# EAGLE board RF12 board (EAGLE 6.2)
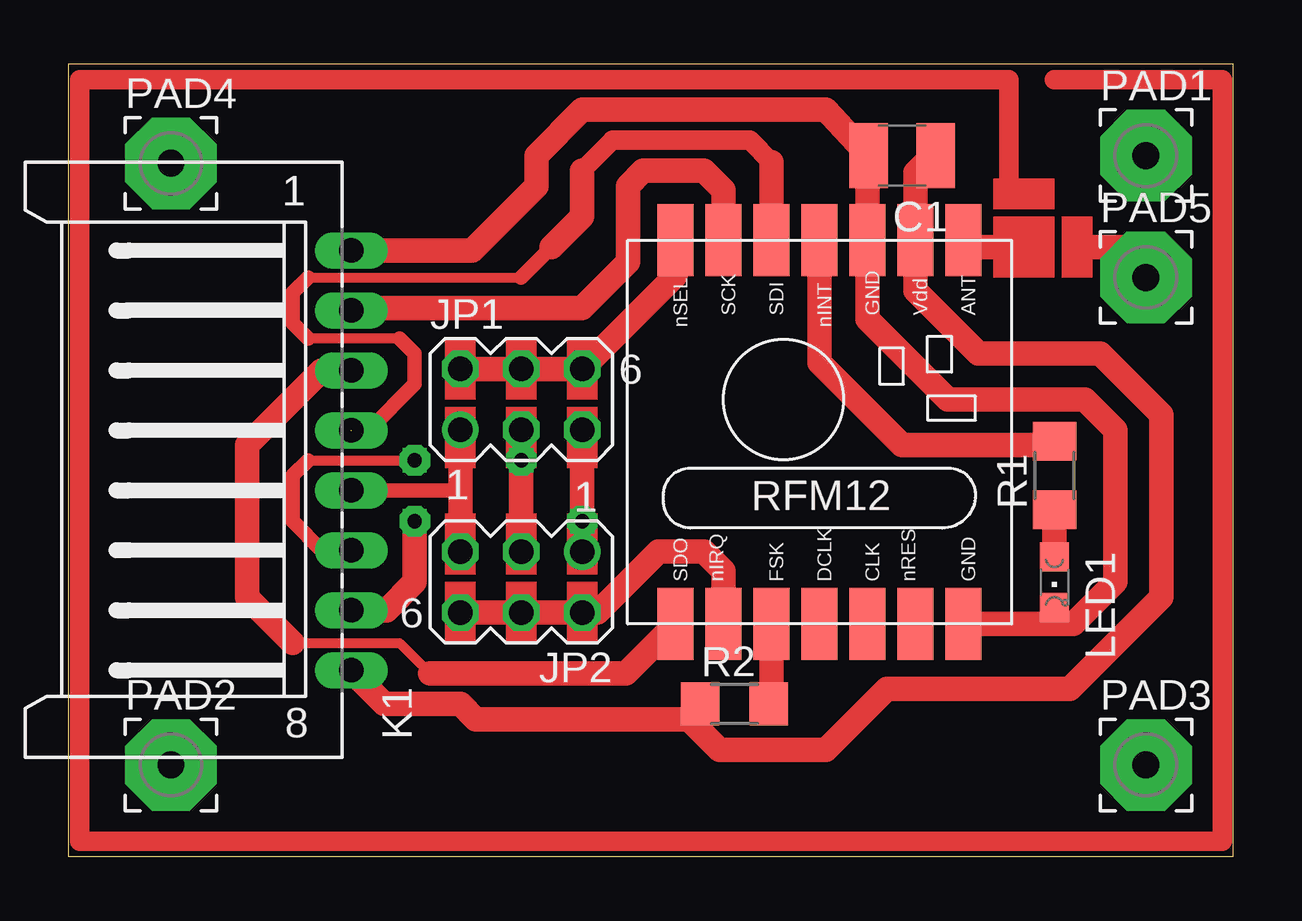
[diagram p0: board, top side]
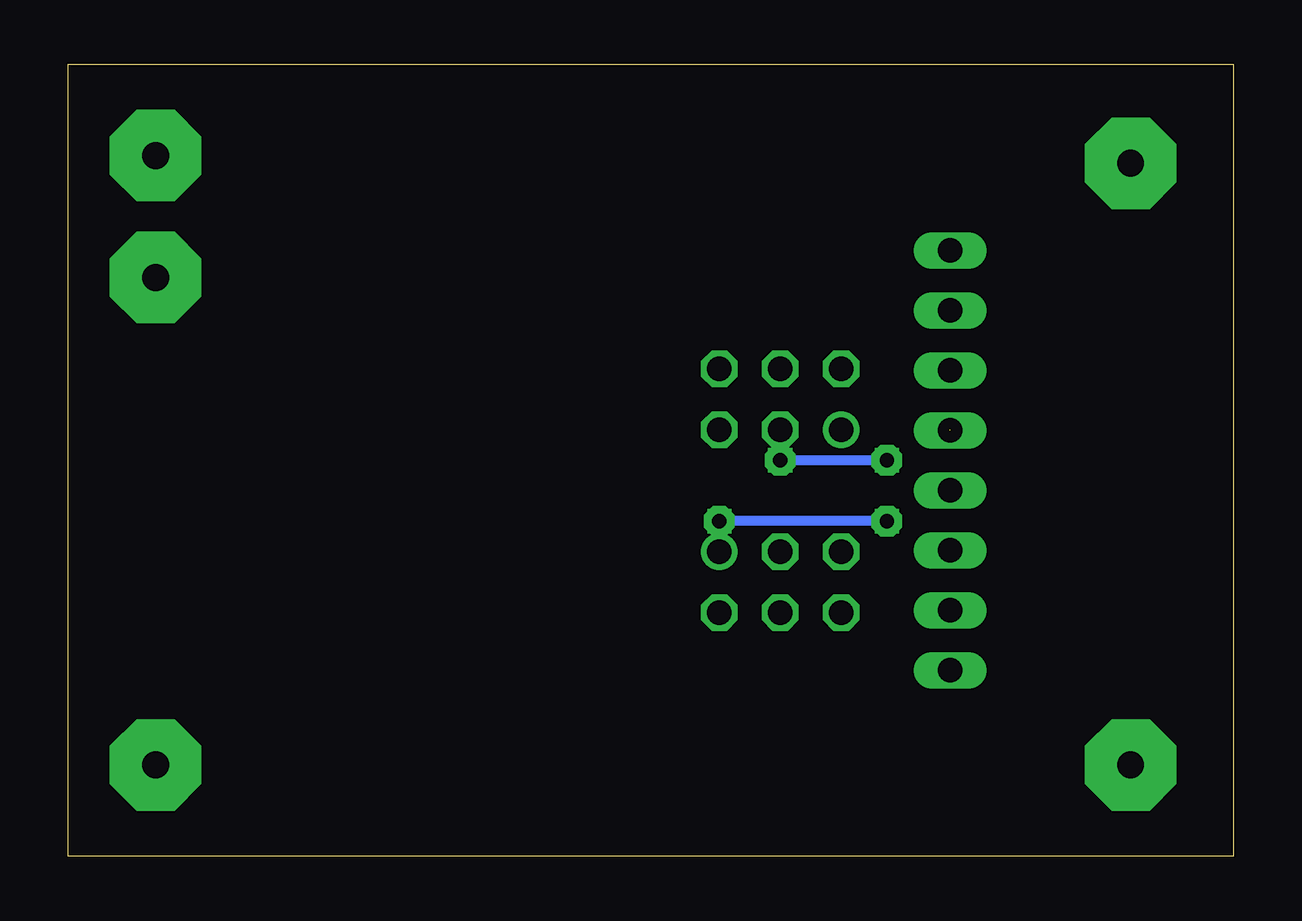
[diagram p1: board, bottom side, seen from below]

Size 48.56 x 33.01 mm. Coordinates in mm from the lower left corner, seen from the top.
Outline: 0,0 48.56,0 48.56,33.01 0,33.01 0,0
Copper layers (1*16): Top 0.035mm / dielectric 1.5mm / Bottom 0.035mm
Design rules: minimum track width 10mil, minimum drill 24mil, track to track 8mil, track to pad 8mil, pad to pad 8mil, via to via 8mil, smd to smd 8mil, copper to edge 40mil, drill to drill 8mil, minimum pad ring 10mil, minimum via ring 8mil, stop-mask expansion 4mil, vias tented up to drill 0mil, thermal gap 10mil

## Footprints (pad centres in the part's own frame; a part is rotated, then mirrored left to right if it is on the bottom)
C1210 = smd 1.6 x 2.7: 1 -1.4,0; 2 1.4,0
MA03-2 = drill 1.016: 1 -2.54,-1.27 | drill 1.016 octagon: 2 -2.54,1.27; 3 0,-1.27; 4 0,1.27; 5 2.54,-1.27; 6 2.54,1.27
L08P = drill 1.016 long: 1 8.75,-6.25; 2 6.25,-6.25; 3 3.75,-6.25; 4 1.25,-6.25; 5 -1.25,-6.25; 6 -3.75,-6.25; 7 -6.25,-6.25; 8 -8.75,-6.25
CHIPLED_0805 = smd 1.2 x 1.2: A 0,-1.05; C 0,1.05
3,81/1,1 = drill 1.118 pad 3.81 octagon: 1 0,0
R1206 = smd 1.6 x 1.803: 1 -1.422,0; 2 1.422,0
RFM12 = smd 1.5 x 3: 1 -5,-10; 2 -3,-10; 3 -1,-10; 4 1,-10; 5 3,-10; 6 5,-10; 7 7,-10; 8 7,6; 9 5,6; 10 3,6; 11 1,6; 12 -1,6; 13 -3,6; 14 -5,6

## Placement (x,y rotation side)
C1  [C1210]  34.76,29.21 180 top
JP1  [MA03-2]  18.88,19.05 0 top
JP2  [MA03-2]  18.88,11.43 180 top
K1  [L08P]  5.55,16.5 90 top
LED1  [CHIPLED_0805]  41.11,11.43 180 top
PAD1  [3,81/1,1]  44.92,29.21 0 top
PAD2  [3,81/1,1]  4.28,3.8 0 top
PAD3  [3,81/1,1]  44.92,3.8 0 top
PAD4  [3,81/1,1]  4.28,28.89 0 top
PAD5  [3,81/1,1]  44.92,24.12 0 top
R1  390  [R1206]  41.11,15.87 90 top
R2  10K  [R1206]  27.77,6.34 0 top
U1  RFM12_SMDSMD  [RFM12]  30.31,19.68 0 top

## Library data of the parts
C1 R1 R2 = rcl
JP1 JP2 = con-lstb
K1 = con-amp-mt
LED1 = led
PAD1-PAD5 = wirepad
U1 = rfm_12

## Nets
CS0: JP1.1 JP2.5 K1.5
CS1: JP1.3 JP2.3 K1.6
CS2: JP1.5 JP2.1 K1.7
GND: C1.2 K1.1 LED1.C U1.7 U1.10
N$2: K1.2 U1.13
N$3: R1.2 U1.11
N$4: K1.3 U1.1
N$6: K1.4 U1.12
N$8: R2.2 U1.3
N$9: JP2.2 JP2.4 JP2.6 U1.2
N$10: JP1.2 JP1.4 JP1.6 U1.14
N$16: LED1.A R1.1
VCC: C1.1 K1.8 R2.1 U1.9

## Tracks (layer width: path | path; a pad name or v marks a point on that pad's centre or on a via)
CS0
  Top 0.61: K1.5 16.32,15.26 16.34,15.24
  Top 1.016: JP2.5 16.34,15.24 JP1.1
CS1  (via drill 0.6)
  Top 0.406: 10,16.5 v14.44,16.5
  Top 0.61: K1.6 10.57,12.76 9.36,13.96 9.36,15.87 10,16.5
  Top 1.016: JP2.3 v18.88,16.5 JP1.3
  Bottom 0.406: v14.44,16.5 v18.88,16.5
CS2  (via drill 0.6)
  Top 1.016: K1.7 13.27,10.26 14.44,11.43 v14.44,13.96 | JP2.1 v21.42,13.96 JP1.5
  Bottom 0.406: v14.44,13.96 v21.42,13.96
GND
  Top 1.016: K1.1 16.84,25.25 19.52,27.94 19.52,29.21 21.42,31.11 31.59,31.11 C1.2 33.31,28.11 U1.10 33.31,22.39 36.66,19.05 42.38,19.05 43.65,17.78 43.65,11.43 41.91,9.68 41.11,9.68 | 41.11,9.68 U1.7 | 41.11,9.68 LED1.C
N$1
  Top 0.813: 39.2,27.62 39.2,32.38 0.47,32.38 0.47,0.63 48.09,0.63 48.09,32.38 41.11,32.38
N$2
  Top 1.016: U1.13 27.31,27.76 26.51,28.57 23.96,28.57 23.33,27.94 23.33,24.76 21.42,22.86 11.9,22.86 K1.2
N$3
  Top 1.016: U1.11 31.31,20.59 34.76,17.14 41.11,17.14 R1.2
N$4
  Top 0.406: 15.07,7.61 13.8,8.88 9.36,8.88
  Top 1.016: 9.36,8.88 7.46,10.79 7.46,17.14 10.57,20.25 K1.3 | 15.07,7.61 23.25,7.61 U1.1
N$5  (via drill 0.6 pad 1.27)
  other vias: 14.44,16.5 14.44,13.96 21.42,13.96
N$6  (1 unrouted)
  Top 0.406: 10,24.12 18.88,24.12 | 13.8,21.59 10,21.59
  Top 0.61: 18.88,24.12 20.16,25.39 | 10,24.12 9.36,23.49 9.36,22.22 10,21.59 | 13.8,21.59 14.44,20.95 14.44,19.68 12.54,17.78 11.82,17.78
  Top 0.813: 29.31,28.94 28.41,29.84 22.7,29.84 21.42,28.57
  Top 1.016: 29.31,28.94 U1.12 | 21.42,28.57 21.42,26.66 20.16,25.39
N$7  (via drill 0.6 pad 1.27)
  other vias: 18.88,16.5
N$8
  Top 1.016: U1.3 29.31,6.86 R2.2
N$9
  Top 1.016: JP2.6 JP2.4 JP2.2 22.06,10.16 24.6,12.7 26.51,12.7 27.31,11.88 U1.2
N$10
  Top 1.016: U1.14 25.31,24.21 JP1.6 JP1.4 JP1.2
N$11
  Top 1.016: 42.38,25.39 44.92,25.39 44.92,24.76
N$16
  Top 1.016: LED1.A R1.1
N$18
  Top 1.016: 37.3,25.39 39.2,25.39
VCC
  Top 1.016: C1.1 36.03,29.21 35.31,28.49 U1.9 35.31,23.57 37.93,20.95 43.02,20.95 45.55,18.41 45.55,10.79 41.74,6.98 34.12,6.98 31.59,4.44 27.14,4.44 25.87,5.71 | 25.87,5.71 16.98,5.71 16.34,6.34 13.17,6.34 11.94,7.57 11.94,7.61 K1.8 | R2.1 26.51,5.86 25.87,5.71
(copper drawn outside any net)
  shapes: Top area x16